# Altium PCB HU_revB.PcbDoc (part 5 of 5)
Units mm, origin at the board's own origin, x right, y up, seen from the top; angles counter-clockwise.
Board outline 164 x 90 mm, 6 copper layers (TOP, GND1, INT SIG, PWR + INT SIG, GND2, BOT), stack 1.538 mm thick; 404 components, 380 nets, 1687 pads, 328 vias.
Unrouted connection lines stored in the file: 342.
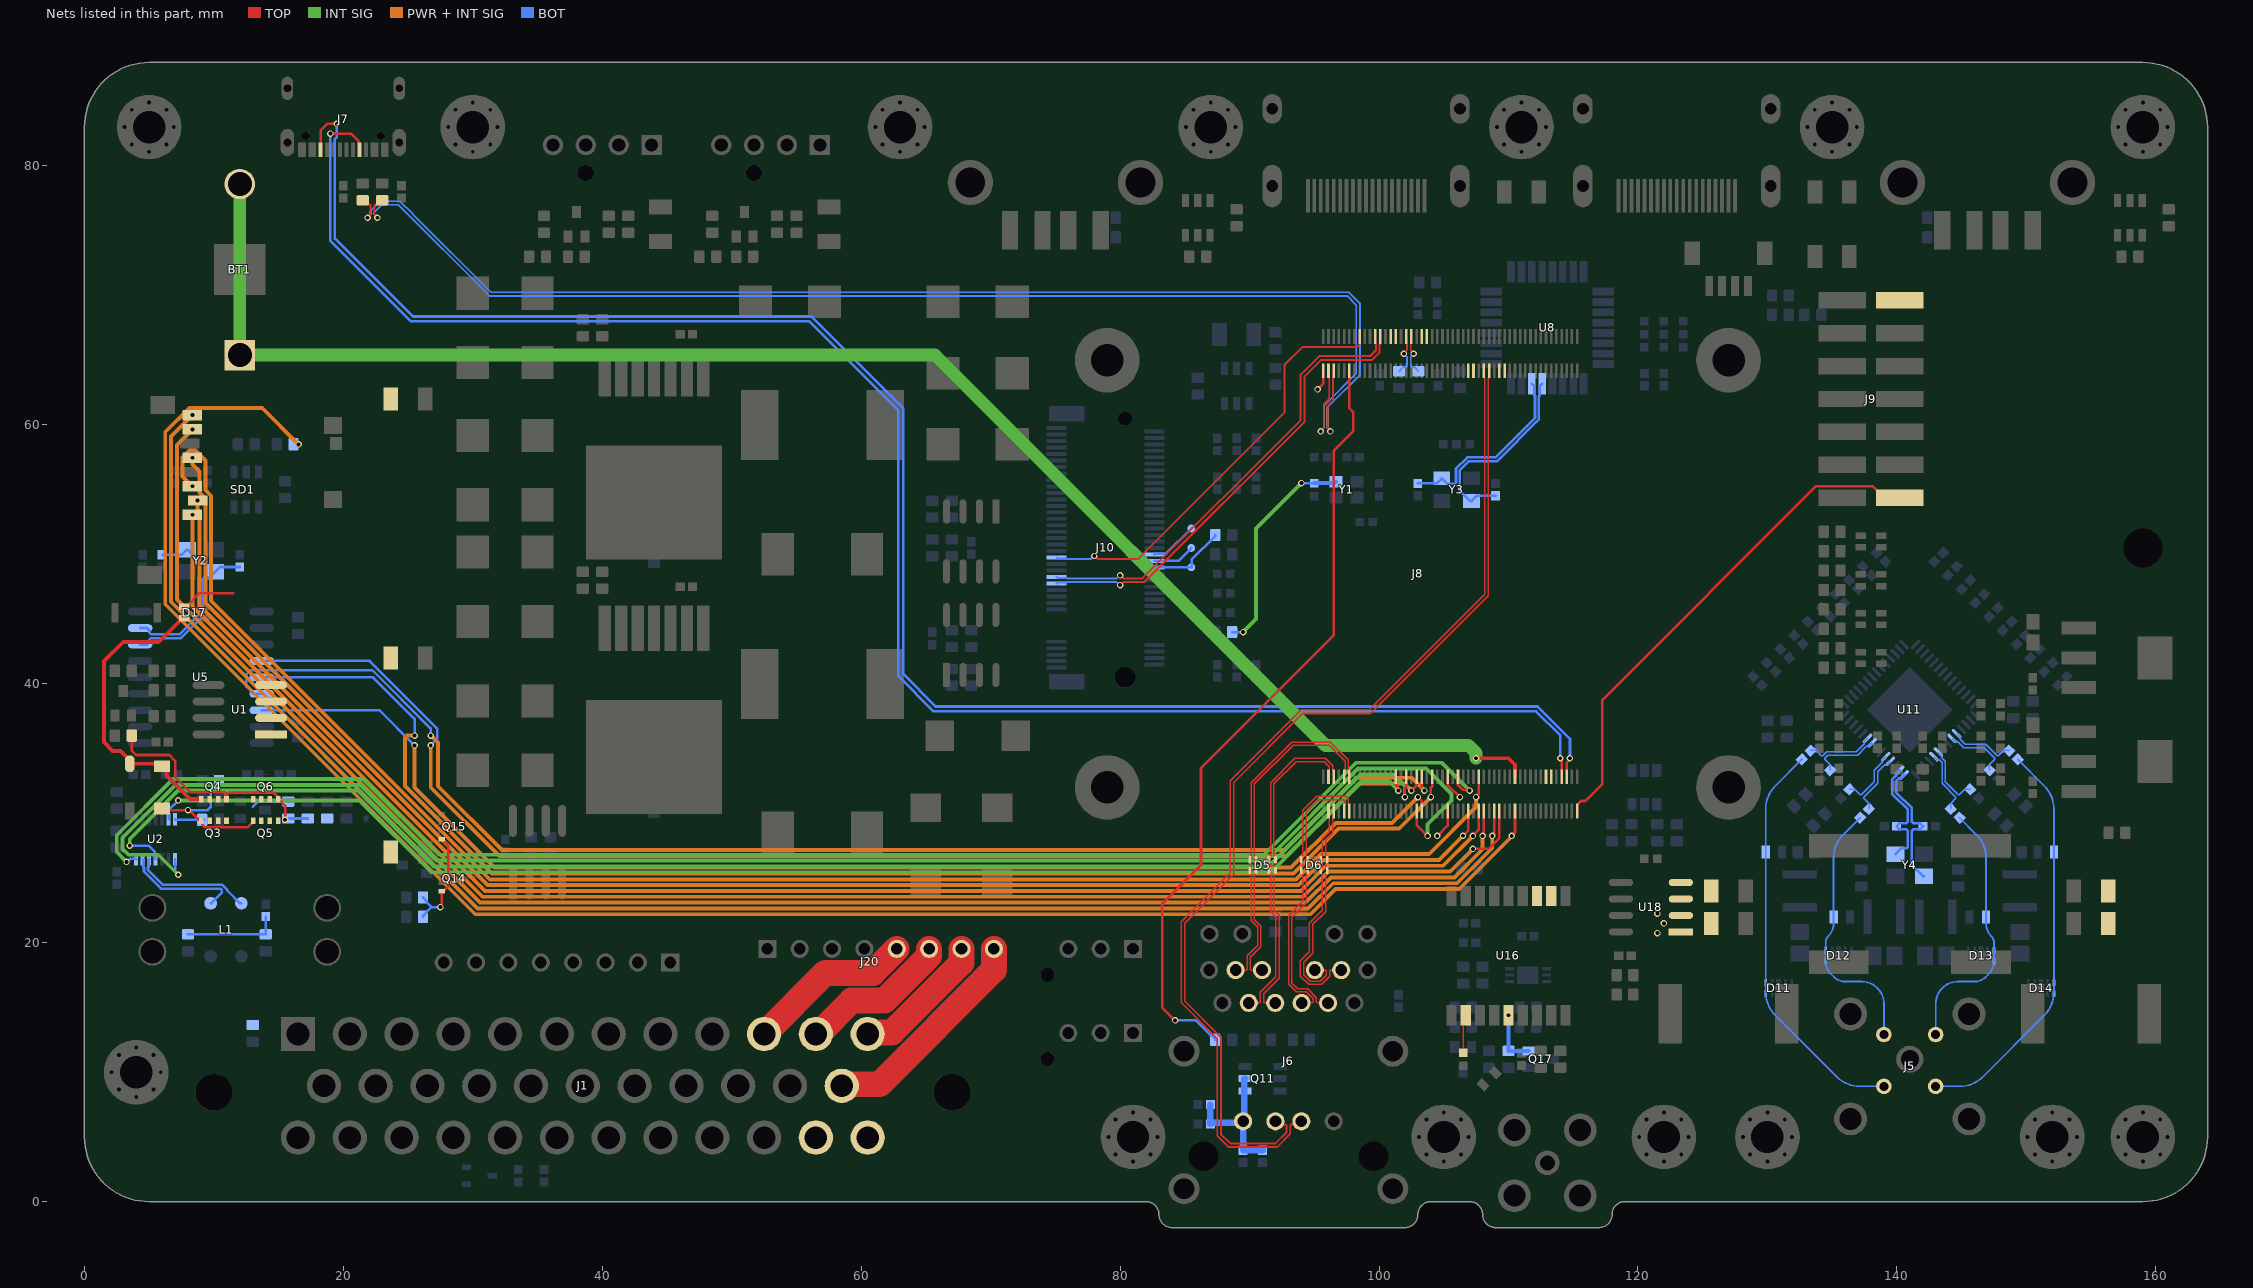
[diagram p8: the nets of this part, all layers, seen from the top]

## Via types
v1: diameter 0.5, hole 0.3, TOP to BOT, 308 vias
v2: diameter 0.5, hole 0.2, TOP to BOT, 16 vias
v3: diameter 0.75, hole 0.5, TOP to BOT, 4 vias

## Nets (pads, with @x,y where several pads share a name; then routed paths per layer and width w, separated by ;. In a path a pad name is that pad's centre, name@x,y a point inside that pad or via, vN(x,y) a via of type N, cw(c..) or ccw(c..) an arc to the next point about the centre after c; other vN are vias at no path point) (continued)
PCIE_RX0_P: J8.116 J10.41 | length 33.2
  TOP w0.155: v1(78,49.875) 78.041,49.875 78.263,49.652 81.402,49.652 92.695,60.945 92.695,64.626 94.091,66.023 96.126,66.023 98.294,66.023 98.477,66.206 98.477,66.797 J8.116@98.5,66.82
  BOT w0.155: J10.41@75.1,49.75 75.173,49.677 75.863,49.677 75.888,49.652 76.576,49.652 77.737,49.652 77.959,49.875 v1(78,49.875)
PCIE_TX0_N: J8.124 J10.49 | length 35.8
  TOP w0.155: v1(80,47.625) 80.041,47.625 80.263,47.848 81.848,47.848 94.25,60.25 94.25,63.75 95.5,65 99.431,65 100.052,65.621 100.052,66.257 100.077,66.282 100.077,66.797 J8.124@100.1,66.82
  BOT w0.155: J10.49@75.1,47.75 75.173,47.823 75.863,47.823 75.888,47.848 79.737,47.848 79.959,47.625 v1(80,47.625)
PCIE_TX0_P: J8.122 J10.47 | length 35.3
  TOP w0.155: v1(80,48.375) 80.041,48.375 80.263,48.152 81.721,48.152 93.945,60.376 93.945,63.876 95.374,65.305 99.305,65.305 99.748,65.748 99.748,66.257 99.723,66.282 99.723,66.797 J8.122@99.7,66.82
  BOT w0.155: J10.47@75.1,48.25 75.173,48.177 75.863,48.177 75.888,48.152 79.737,48.152 79.959,48.375 v1(80,48.375)
PMIC_EN: J8.99 J9.A7 | length 39.8
  TOP w0.2: J8.99@115.3,30.18 115.3,30.65 115.6,30.95 115.938,30.95 117.25,32.262 117.25,38.75 133.765,55.265 138.129,55.265 139.014,54.38 J9.A7@140.22,54.38
PoC_A: C70.2 D11.1 D11.10 J5.2 L6.2 | length 31.6
  BOT w0.14: C70.2@132.662,34.162 130.609,32.109 ccw(c132.405,30.313) 129.865,30.313 129.865,16.187 ccw(c132.405,16.187) 130.609,14.391 135.346,9.654 ccw(c137.142,11.45) 137.142,8.91 J5.2@139,8.91
PoC_B: C71.2 D12.1 D12.10 J5.1 L9.2 | length 20.7
  BOT w0.14: C71.2@137.162,29.662 135.859,28.359 ccw(c137.655,26.563) 135.115,26.563 135.115,21.502 cw(c133.698,21.502) 134.7,20.5 ccw(c135.183,20.017) 134.5,20.017 D12.10@134.5,18.583 ccw(c135.906,18.583) 134.912,17.588 135.147,17.353 ccw(c136,18.207) 136,17 137.293,17 cw(c137.293,15.293) 138.5,16.5 cw(c137.293,15.293) 139,15.293 J5.1@139,12.91
PoC_C: C74.2 D13.1 D13.10 J5.4 L15.2 | length 20.7
  BOT w0.14: J5.4@143,12.91 143,15.293 cw(c144.707,15.293) 143.5,16.5 cw(c144.707,15.293) 144.707,17 146,17 ccw(c146,18.207) 146.853,17.353 147.088,17.588 ccw(c146.094,18.583) D13.1@147.5,18.583 147.5,20.017 ccw(c146.817,20.017) 147.3,20.5 cw(c148.302,21.502) 146.885,21.502 146.885,26.563 ccw(c144.345,26.563) 146.141,28.359 C74.2@144.838,29.662
PoC_D: C75.2 D14.1 D14.10 J5.3 L12.2 | length 31.6
  BOT w0.14: J5.3@143,8.91 144.858,8.91 ccw(c144.858,11.45) 146.654,9.654 151.391,14.391 ccw(c149.595,16.187) 152.135,16.187 152.135,30.313 ccw(c149.595,30.313) 151.391,32.109 C75.2@149.338,34.162
PoC_PWR: F12.1 F13.1 F14.1 F15.1 U18.3 U18.4
PRE_CAN_N: L1.3 U2.12 | length 9.2
  BOT w0.2: U2.12@5,26.457 4.947,26.405 4.947,25.839 4.901,25.792 4.901,25.627 6.043,24.484 10.626,24.484 11.037,24.073 11.037,24.017 12.004,23.05 L1.3@12.125,23.05
PRE_CAN_P: L1.2 U2.13 | length 9
  BOT w0.2: U2.13@4.5,26.457 4.552,26.405 4.552,25.839 4.599,25.792 4.599,25.502 5.918,24.183 10.501,24.183 10.618,24.066 10.618,23.9 9.768,23.05 L1.2@9.75,23.05
PRE_PoC_PWR: F6.2 U18.1 U18.2
  other v1: 121.5,20.75 122,21.5 121.5,22.25
PRE_RC_DBG_USB_N: J8.103 R140.2 | length 97.5
  TOP w0.135: v1(22.625,76) 22.625,76.029 22.393,76.262 22.393,76.966 22.472,77.045 22.695,77.045 R140.2@23,77.35 ; v1(95.5,59.5) 95.5,59.529 95.732,59.762 95.732,61.603 96.157,62.028 96.157,63.598 96.132,63.623 96.132,64.148 J8.103@96.1,64.18
  BOT w0.135: v1(22.625,76) 22.625,76.029 22.393,76.262 22.393,76.429 22.964,77 24.25,77 31.285,69.965 97.535,69.965 98.25,69.25 98.25,64 95.899,61.649 95.732,61.482 95.732,59.762 95.5,59.529 v1(95.5,59.5)
PRE_RC_DBG_USB_P: J8.105 R23.2 | length 98.5
  TOP w0.135: R23.2@21.5,77.35 21.805,77.045 22.028,77.045 22.107,76.966 22.107,76.262 21.875,76.029 v1(21.875,76) ; v1(96.25,59.5) 96.25,59.529 96.018,59.762 96.018,61.485 96.443,61.91 96.443,63.598 96.468,63.623 96.468,64.148 J8.105@96.5,64.18
  BOT w0.135: v1(21.875,76) 21.875,76.029 22.107,76.262 22.107,76.547 22.845,77.285 24.368,77.285 25.351,76.303 25.452,76.202 31.404,70.25 97.654,70.25 98.535,69.368 98.535,63.882 96.018,61.364 96.018,59.762 96.25,59.529 v1(96.25,59.5)
PRE_SHUNT: Q4.5-6-7-8 Q6.5-6-7-8 U1.1 U1.2
PRE_VCC: D1.1 D3.2 D17.3 Q3.1 Q3.2 Q3.3 Q4.1 Q4.2 Q4.3 Q5.1 Q5.2 Q5.3 Q6.1 Q6.2 Q6.3 R15.2 | length 26.3
  TOP w0.3: D1.1@6,33.635 6.003,33.632 6.042,33.632 6.344,33.33 6.344,32.906 8.16,31.09 Q4.1@9.025,31.09 ; D1.1@6,33.75 5.925,33.825 D3.2@3.5,33.825 3.5,34.098 2.775,34.823 2.177,34.823 1.5,35.5 1.5,41.75 2.995,43.245 5.745,43.245 D17.3@7.525,45.025
  BOT w0.2: 13,30.5 13.4,30.9 R15.2@15.75,30.9
PWR_MOSFET: Q14.4 Q15.4 R109.1 R110.2 | length 8.5
  TOP w0.2: v1(27.5,22.75) 27.5,22.831 27.6,22.931 Q14.4@27.6,23.987 27.675,24.062 27.804,24.062 28.1,24.359 28.1,27.562 27.75,27.912 27.675,27.987 Q15.4@27.6,27.987
  BOT w0.2: R109.1@26.15,22 26.15,22.075 26.825,22.75 ; R110.2@26.15,23.5 26.45,23.2 26.45,23.125 26.825,22.75 ; v1(27.5,22.75) 26.825,22.75
PWR_OUT: D17.2 F3.1 F5.1 F6.1 F7.1 R13.2 U1.3 U1.4 | length 4.2
  TOP w0.2: D17.2@7.7,45.95 7.85,45.95 8.9,47 11.5,47
PWR_SW_MOS_GATE: Q4.4 Q6.4 R15.1 R16.2 R143.1 | length 18.9
  TOP w0.2: R143.1@3.65,36 3.65,34.85 4,34.5 6.554,34.5 7,34.054 7,32.816 8.206,31.61 10.783,31.61 10.9,31.493 10.9,31.165 Q4.4@10.975,31.09 11.041,31.156 11.041,31.473 11.159,31.59 14.604,31.59 14.9,31.294 14.9,31.165 Q6.4@14.975,31.09 15.5,30.565 v1(15.5,29.5)
  BOT w0.2: R15.1@15.75,29.6 R16.2@17.25,29.6
RF_IN: R115.1 U16.11 | length 3
  TOP w0.14: R115.1@106.5,11.5 106.5,13.917 cw(c107.183,13.917) U16.11@106.7,14.4
RL_N: J1.23 J20.8 | length 17.1
  TOP w2: J1.23@58.5,8.95 58.624,9.074 61.421,9.074 70.25,17.903 J20.8@70.25,19.525
RL_P: J1.12 J20.7 | length 10.6
  TOP w2: J1.12@60.5,12.95 60.624,13.074 62.38,13.074 67.75,18.444 J20.7@67.75,19.525
RP_MOS_LINK: D1.2 Q3.4 Q5.4 R12.2 | length 12.1
  TOP w0.2: D1.2@6,30.365 6.115,30.25 v1(8,30.25) ; v1@8.07,30.25 8.76,29.56 8.95,29.56 9.025,29.485 Q3.4@9.025,29.41 9.1,29.335 9.1,29.115 9.305,28.91 12.6,28.91 13.025,29.335 Q5.4@13.025,29.41
  BOT w0.2: v1(8,30.25) 9.52,30.25 9.75,30.48 9.75,31.25 9.75,31.52 9.75,31.775 10.4,32.425 R12.2@10.4,32.5
RPI_1V8: J8.88 J8.90
RR_N: J1.11 J20.6 | length 11.8
  TOP w2: J1.11@56.5,12.95 56.676,12.95 59.251,15.525 61.791,15.525 65.25,18.984 J20.6@65.25,19.525
RR_P: J1.10 J20.5 | length 13
  TOP w2: J1.10@52.5,12.95 57.225,17.675 60.9,17.675 J20.5@62.75,19.525
RXD: U16.3
SD_CLK: J8.57 SD1.5 | length 121.5
  TOP w0.2: v1(106.486,28.264) 106.9,28.678 J8.57@106.9,30.18
  PWR + INT SIG w0.3: v1(8.34,57.46) 8.34,56.938 8.89,56.388 8.89,54.788 9.34,54.338 9.34,46.232 31.122,24.45 93.768,24.45 95.718,26.4 104.622,26.4 v1(106.486,28.264)
SD_CMD: J8.62 SD1.3 | length 127.2
  TOP w0.2: v1(107.5,31.25) 107.5,31.317 107.7,31.517 J8.62@107.7,32.82
  PWR + INT SIG w0.3: v1(8.34,55.26) 7.59,56.01 7.59,57.488 8.112,58.01 8.568,58.01 9.34,57.238 9.34,54.974 9.79,54.524 9.79,46.419 31.309,24.9 93.582,24.9 95.532,26.85 103.878,26.85 107.5,30.472 v1(107.5,31.25)
SD_DAT0: J8.63 SD1.7 | length 128.9
  TOP w0.2: v1(108,28.25) 108,28.331 108.1,28.431 J8.63@108.1,30.18
  PWR + INT SIG w0.3: v1(8.34,59.66) 7.14,58.46 7.14,46.523 30.563,23.1 94.327,23.1 96.277,25.05 105.828,25.05 108,27.222 v1(108,28.25)
SD_DAT1: J8.67 SD1.8 | length 131.8
  TOP w0.2: v1(108.75,28.25) 108.75,28.331 108.9,28.481 J8.67@108.9,30.18
  PWR + INT SIG w0.3: v1(8.34,60.76) 6.69,59.11 6.69,46.337 30.377,22.65 94.514,22.65 96.464,24.6 106.014,24.6 108.75,27.336 v1(108.75,28.25)
SD_DAT2: J8.69 SD1.1 | length 121.3
  TOP w0.2: v1(107.25,27.25) 108.457,27.25 109.3,28.093 J8.69@109.3,30.18
  PWR + INT SIG w0.3: v1(8.34,53.06) 8.34,45.96 30.75,23.55 94.141,23.55 96.091,25.5 105.5,25.5 v1(107.25,27.25)
SD_DAT3: J8.61 SD1.2 | length 119.5
  TOP w0.2: v1(107.25,28.25) 107.25,28.269 107.7,28.719 J8.61@107.7,30.18
  PWR + INT SIG w0.3: v1(8.74,54.16) 8.74,53.438 8.89,53.288 8.89,46.046 30.936,24 93.954,24 95.904,25.95 104.95,25.95 v1(107.25,28.25)
SD_PWR_EN: J8.75 R60.2 | length 144
  TOP w0.2: v1(110.25,28.25) 110.25,28.267 110.5,28.517 J8.75@110.5,30.18
  PWR + INT SIG w0.3: v1(16.55,58.5) 13.74,61.31 8.112,61.31 6.24,59.438 6.24,46.15 30.19,22.2 94.7,22.2 96.65,24.15 106.201,24.15 110.25,28.199 v1(110.25,28.25)
SIOA_N: C72.1 U11.22 | length 5.2
  BOT w0.103: C72.1@134.838,33.338 134.854,33.354 134.854,33.756 134.437,34.173 134.437,34.258 134.675,34.497 136.968,34.497 137.654,35.182 137.828,35.182 U11.22@138.083,35.437
SIOA_P: C70.1 U11.23 | length 5.2
  BOT w0.103: C70.1@133.338,34.838 133.354,34.854 133.756,34.854 134.173,34.437 134.258,34.437 134.571,34.75 136.864,34.75 137.475,35.361 137.475,35.536 U11.23@137.73,35.79
SIOB_N: C73.1 U11.19 | length 4.8
  BOT w0.103: C73.1@136.338,31.838 136.354,31.854 136.756,31.854 137.173,31.437 137.258,31.437 138.261,32.44 138.261,33.319 138.889,33.947 138.889,34.121 U11.19@139.144,34.376
SIOB_P: C71.1 U11.18 | length 4.8
  BOT w0.103: C71.1@137.838,30.338 137.854,30.354 137.854,30.756 137.437,31.173 137.437,31.258 138.514,32.335 138.514,33.214 139.068,33.768 139.243,33.768 U11.18@139.497,34.023
SIOC_N: C76.1 U11.9 | length 5
  BOT w0.103: U11.9@143.21,34.73 143.464,34.475 143.464,34.3 143.75,34.015 143.75,32.429 144.742,31.437 144.827,31.437 145.244,31.854 145.646,31.854 C76.1@145.662,31.838
SIOC_P: C74.1 U11.10 | length 5
  BOT w0.103: U11.10@142.856,34.376 143.111,34.121 143.286,34.121 143.497,33.91 143.497,32.325 144.563,31.258 144.563,31.173 144.146,30.756 144.146,30.354 C74.1@144.162,30.338
SIOD_N: C77.1 U11.6 | length 5
  BOT w0.103: U11.6@144.27,35.79 144.525,35.536 144.7,35.536 145.173,35.062 146.759,35.062 147.563,34.258 147.563,34.173 147.146,33.756 147.146,33.354 C77.1@147.162,33.338
SIOD_P: C75.1 U11.5 | length 5
  BOT w0.103: U11.5@144.624,36.144 144.879,35.889 144.879,35.714 145.278,35.315 146.864,35.315 147.742,34.437 147.827,34.437 148.244,34.854 148.646,34.854 C75.1@148.662,34.838
SMB_CLK: J10.40 TP1.1 | length 3.7
  BOT w0.2: J10.40@82.65,50 82.7,50.05 83.55,50.05 TP1.1@85.5,52
SMB_DATA: J10.42 TP2.1 | length 3.3
  BOT w0.2: J10.42@82.65,49.5 84.5,49.5 TP2.1@85.5,50.5
SMB_nALERT: J10.44 R40.2 TP3.1 | length 6.1
  BOT w0.2: J10.44@82.65,49 TP3.1@85.5,49 85.525,49.025 85.525,49.6 87.35,51.425 R40.2@87.35,51.5
SPI0_MISO: J8.40 U5.15 | length 105.5
  TOP w0.2: J8.40@103.3,32.82 103.3,32.006 103.5,31.806 v1(103.5,31.75)
  PWR + INT SIG w0.3: v1(26.75,36) 26.778,36 27.3,35.478 27.3,32.091 32.241,27.15 92.65,27.15 98.25,32.75 102.5,32.75 v1(103.5,31.75)
  BOT w0.2: U5.15@13.7,39.23 13.05,39.23 12.5,39.78 12.5,40.728 12.822,41.05 22.245,41.05 26.745,36.55 26.745,36.005 v1(26.75,36)
SPI0_MOSI: J8.44 U5.14 | length 105.1
  TOP w0.2: v1(104,31.25) 104,31.957 104.1,32.057 J8.44@104.1,32.82
  PWR + INT SIG w0.3: v1(25.5,36) 24.926,36 24.75,35.824 24.75,32.095 31.495,25.35 93.395,25.35 96.859,28.814 101.564,28.814 v1(104,31.25)
  BOT w0.2: U5.14@13.7,40.5 22.3,40.5 25.5,37.3 v1(25.5,36)
SPI0_nCS0: J8.39 U5.16 | length 99.7
  TOP w0.2: v1(103,31.25) 103.3,30.95 J8.39@103.3,30.18
  PWR + INT SIG w0.3: v1(25.5,35.25) 25.5,31.982 31.682,25.8 93.209,25.8 96.673,29.264 101.014,29.264 v1(103,31.25)
  BOT w0.2: U5.16@13.7,37.96 22.79,37.96 v1(25.5,35.25)
SPI0_SCLK: J8.38 U5.13 | length 102.2
  TOP w0.2: v1(102.5,31.749) 102.9,32.149 J8.38@102.9,32.82
  PWR + INT SIG w0.3: v1(26.75,35.25) 26.75,32.004 32.054,26.7 92.836,26.7 98.436,32.3 101.949,32.3 v1(102.5,31.749)
  BOT w0.2: U5.13@13.7,41.77 22.02,41.77 27.25,36.54 27.25,35.75 v1(26.75,35.25)
SPI1_nCS0: J8.49 U6.1 | length 2.3
  TOP w0.2: v1(104.5,28.25) 105.3,29.05 J8.49@105.3,30.18
SPI1_nCS1: J8.50 U7.1 | length 2
  TOP w0.2: J8.50@105.3,32.82 105.3,32.196 106.246,31.25 v1(106.25,31.25)
SPI3_MISO: J8.34 U2.11 | length 111.5
  TOP w0.2: v1(102,31.25) 102,31.957 102.1,32.057 J8.34@102.1,32.82
  INT SIG w0.2: v1(102,31.25) 102,32.1
  INT SIG w0.3: v1(3.5,27.5) 3.5,28.027 7.223,31.75 21.146,31.75 26.996,25.9 91.473,25.9 98.573,33 101.1,33 102,32.1
  BOT w0.2: v1(3.5,27.5) 4.952,27.5 5.448,27.004 5.448,26.509 U2.11@5.5,26.457
SPI3_MOSI: J8.30 U2.6 | length 102.7
  TOP w0.2: J8.30@101.3,32.82 101.3,32.196 101.443,32.054 101.443,31.807 v1(101.5,31.75)
  INT SIG w0.3: v1(7.25,31) 21.26,31 26.809,25.45 91.659,25.45 98.709,32.5 100.75,32.5 v1(101.5,31.75)
  BOT w0.2: U2.6@6.5,29.543 6.5,30.25 v1@7.25,31
SPI3_nCS0: J8.54 U2.14 | length 117.5
  TOP w0.2: J8.54@106.1,32.82 106.1,32.196 106.489,31.807 106.943,31.807 v1(107,31.75)
  INT SIG w0.3: v1(3.25,26.25) 2.5,27 2.5,28.3 6.85,32.65 21.519,32.65 27.369,26.8 91.1,26.8 98.2,33.9 104.85,33.9 v1(107,31.75)
  BOT w0.2: v1(3.25,26.25) 3.297,26.25 3.547,26.5 3.947,26.5 3.99,26.457 U2.14@4,26.457
SPI3_SCLK: J8.37 U2.8 | length 124.1
  TOP w0.2: J8.37@102.9,30.18 102.9,29.1 v1(103.75,28.25)
  INT SIG w0.3: v1(7.25,25.25) 5.7,26.8 3.4,26.8 2.95,27.25 2.95,28.114 7.036,32.2 21.332,32.2 27.182,26.35 91.286,26.35 98.386,33.45 103.65,33.45 105.6,31.5 105.6,31 103.75,29.15 v1(103.75,28.25)
  BOT w0.2: U2.8@7,26.457 7,25.5 v1(7.25,25.25)
SUB_N: J1.35
SUB_P: J1.34
SUSCLK_32: R39.1 R49.2 Y1.3 | length 16.9
  INT SIG w0.3: v1(89.5,44) 90.5,45 90.5,52 v1(94,55.5)
  BOT w0.2: R39.1@88.65,44 v1(89.5,44) ; v1(94,55.5) R49.2@95,55.5
  BOT w0.3: R49.2@95,55.5 96.575,55.5 Y1.3@96.688,55.613
TCAN_CAN_INH: R17.1 R22.2 U2.7 | length 2.3
  BOT w0.2: U2.7@7,29.543 7.043,29.5 R17.1@9.25,29.5
TERM_CAP: C9.2 R21.1 R24.2 | length 7.4
  BOT w0.2: R24.2@8,20.65 R21.1@14,20.65 C9.2@14,22.021
TRD0_N: D5.2 D5.9 J6.10 J8.10 | length 26
  TOP w0.103: J6.10@90.96,17.89 90.127,17.89 90.066,17.95 90.066,18.876 90.877,19.687 90.877,21.288 90.376,21.789 90.376,25.291 90.437,25.351 90.451,25.351 90.5,25.4 90.5,25.765 90.451,25.814 90.437,25.814 90.376,25.874 90.376,26.126 90.437,26.186 90.451,26.186 90.5,26.235 90.5,26.6 90.451,26.649 90.437,26.649 90.376,26.709 90.376,32.269 93.358,35.25 96.142,35.25 97.374,34.019 97.374,33.364 97.3,33.29 J8.10@97.3,32.82
TRD0_P: D5.1 D5.10 J6.11 J8.12 | length 26.8
  TOP w0.103: J6.11@88.92,17.89 89.753,17.89 89.814,17.95 89.814,18.98 90.624,19.791 90.624,21.183 90.124,21.684 90.124,25.291 90.063,25.351 90.049,25.351 90,25.4 90,25.765 90.049,25.814 90.063,25.814 90.124,25.874 90.124,26.126 90.063,26.186 90.049,26.186 90,26.235 90,26.6 90.049,26.649 90.063,26.649 90.124,26.709 90.124,32.374 93.253,35.503 96.247,35.503 97.626,34.124 97.626,33.364 97.7,33.29 J8.12@97.7,32.82
TRD1_N: D5.4 D5.7 J6.5 J8.6 | length 25.5
  TOP w0.103: J6.5@89.94,15.35 90.773,15.35 90.834,15.41 90.834,16.169 92.024,17.359 92.024,22.01 91.624,22.411 91.624,25.291 91.563,25.351 91.549,25.351 91.5,25.4 91.5,25.765 91.549,25.814 91.563,25.814 91.624,25.874 91.624,26.126 91.563,26.186 91.549,26.186 91.5,26.235 91.5,26.6 91.549,26.649 91.563,26.649 91.624,26.709 91.624,32.374 93.503,34.253 95.855,34.253 96.426,33.681 96.426,33.364 96.5,33.29 J8.6@96.5,32.82
TRD1_P: D5.5 D5.6 J6.4 J8.4 | length 24.7
  TOP w0.103: J6.4@91.98,15.35 91.147,15.35 91.086,15.41 91.086,16.064 92.277,17.255 92.277,22.115 91.876,22.516 91.876,25.291 91.937,25.351 91.951,25.351 92,25.4 92,25.765 91.951,25.814 91.937,25.814 91.876,25.874 91.876,26.126 91.937,26.186 91.951,26.186 92,26.235 92,26.6 91.951,26.649 91.937,26.649 91.876,26.709 91.876,32.269 93.608,34 95.75,34 96.174,33.576 96.174,33.364 96.1,33.29 J8.4@96.1,32.82
TRD2_N: D6.2 D6.9 J6.2 J8.9 | length 21.8
  TOP w0.103: J6.2@96.06,15.35 95.227,15.35 95.166,15.41 95.166,15.769 94.479,16.457 93.708,16.457 93.276,16.89 93.276,21.983 94.376,23.084 94.376,25.291 94.437,25.351 94.451,25.351 94.5,25.4 D6.2@94.5,25.583 94.5,25.765 94.451,25.814 94.437,25.814 94.376,25.874 94.376,26.126 94.437,26.186 94.451,26.186 94.5,26.235 D6.9@94.5,26.418 94.5,26.6 94.451,26.649 94.437,26.649 94.376,26.709 94.376,27.144 94.376,27.145 94.376,30.126 95.311,31.061 97.313,31.061 97.374,31.001 97.374,30.724 97.3,30.65 J8.9@97.3,30.18
TRD2_P: D6.1 D6.10 J6.3 J8.11 | length 22.7
  TOP w0.103: J6.3@94.02,15.35 94.853,15.35 94.914,15.41 94.914,15.665 94.374,16.204 93.603,16.204 93.023,16.785 93.023,22.088 94.124,23.189 94.124,25.291 94.063,25.351 94.049,25.351 94,25.4 D6.1@94,25.583 94,25.765 94.049,25.814 94.063,25.814 94.124,25.874 94.124,26.126 94.063,26.186 94.049,26.186 94,26.235 D6.10@94,26.418 94,26.6 94.049,26.649 94.063,26.649 94.124,26.709 94.124,27.039 94.123,27.04 94.123,30.23 95.207,31.314 97.418,31.314 97.626,31.106 97.626,30.724 97.7,30.65 J8.11@97.7,30.18
TRD3_N: D6.5 D6.6 J6.9 J8.5 | length 17.2
  TOP w0.103: J6.9@95.04,17.89 95.873,17.89 95.934,17.83 95.934,17.509 95.46,17.036 94.686,17.036 94.186,17.536 94.186,18.493 94.876,19.183 94.876,21.411 95.876,22.412 95.876,25.291 95.937,25.351 95.951,25.351 96,25.4 96,25.765 95.951,25.814 95.937,25.814 95.876,25.874 95.876,26.126 95.937,26.186 95.951,26.186 96,26.235 96,26.6 95.951,26.649 95.937,26.649 95.876,26.709 95.876,27.932 96.426,28.482 96.426,29.636 96.5,29.71 J8.5@96.5,30.18
TRD3_P: D6.4 D6.7 J6.8 J8.3 | length 18.1
  TOP w0.103: J8.3@96.1,30.18 96.1,29.71 96.174,29.636 96.174,28.587 95.624,28.037 95.624,26.709 95.563,26.649 95.549,26.649 95.5,26.6 95.5,26.235 95.549,26.186 95.563,26.186 95.624,26.126 95.624,25.874 95.563,25.814 95.549,25.814 95.5,25.765 95.5,25.4 95.549,25.351 95.563,25.351 95.624,25.291 95.624,22.517 94.623,21.516 94.623,19.288 93.933,18.598 93.933,17.431 94.581,16.783 95.565,16.783 96.186,17.404 96.186,17.83 96.247,17.89 J6.8@97.08,17.89
TUSB2036_X_N: C59.1 U8.29 Y3.3 | length 15.4
  BOT w0.2: C59.1@109,54.521 107.546,54.521 Y3.3@107.15,54.125 107.025,54.125 106.233,54.917 106.233,55.426 106.25,55.442 106.25,56.504 106.945,57.198 109.125,57.198 109.302,57.375 112.174,60.248 112.351,60.424 112.351,62.206 112.4,62.256 112.4,62.975 U8.29@112.6,63.175
TUSB2036_X_P: C58.1 U8.30 Y3.1 | length 14.9
  BOT w0.2: C58.1@103,55.479 104.454,55.479 Y3.1@104.85,55.875 105.275,55.45 105.831,55.45 105.948,55.567 105.948,56.628 106.82,57.5 109,57.5 112.049,60.549 112.049,62.206 112,62.256 112,62.975 U8.30@111.8,63.175
TXD: U16.2
USB2_CC1: J7.A5 J8.94 | length 137.5
  TOP w0.2: v1(19,82.5) 20.574,82.5 21.2,81.874 21.2,81.3 J7.A5@21.25,81.25 ; v1(114,34.25) 114,34.169 114.1,34.069 J8.94@114.1,32.82
  BOT w0.2: v1(19,82.5) 19,74.223 25.223,68 56,68 62.878,61.122 62.878,40.596 65.596,37.878 112.128,37.878 114,36.005 v1(114,34.25)
USB2_CC2: J7.B5 J8.96 | length 138.3
  TOP w0.2: J7.B5@18.25,81.25 18.25,82.75 18.75,83.25 v1(19.5,83.25) ; J8.96@114.5,32.82 114.5,33.919 114.75,34.169 v1(114.75,34.25)
  BOT w0.2: v1(19.5,83.25) 19.5,82.25 19.35,82.1 19.35,74.4 25.378,68.372 56.154,68.372 63.25,61.277 63.25,40.75 65.75,38.25 112.25,38.25 114.75,35.75 v1(114.75,34.25)
USB3_0_D_N: J8.136 R71.2 | length 3.3
  TOP w0.135: J8.136@102.5,66.82 102.468,66.788 102.468,66.263 102.443,66.238 102.443,65.929 102.443,65.762 102.675,65.529 v1(102.675,65.5)
  BOT w0.135: v1(102.675,65.5) 102.675,65.471 102.443,65.238 102.443,64.801 102.443,64.534 102.522,64.455 102.745,64.455 R71.2@103.05,64.15
USB3_0_D_P: J8.134 R74.2 | length 3.3
  TOP w0.135: v1(101.925,65.5) 101.925,65.529 102.157,65.762 102.157,66.047 102.157,66.238 102.132,66.263 102.132,66.788 J8.134@102.1,66.82
  BOT w0.135: R74.2@101.55,64.15 101.855,64.455 102.078,64.455 102.157,64.534 102.157,64.682 102.157,65.238 101.925,65.471 v1(101.925,65.5)
USB3_0_RX_N: J8.128
USB3_0_RX_P: J8.130
USB3_0_TX_N: J8.140
USB3_0_TX_P: J8.142
USB3_1_D_N: J6.U2 J8.165 | length 80.2
  TOP w0.135: J6.U2@92,6.21 92.242,5.968 92.771,5.968 92.857,5.882 92.857,5.357 92,4.5 88.5,4.5 87.785,5.215 87.785,12.715 85,15.5 85,21.5 88.785,25.285 88.785,32.382 94.118,37.715 99.368,37.715 108.443,46.789 108.443,63.598 108.468,63.623 108.468,64.148 J8.165@108.5,64.18
USB3_1_D_P: J6.U3 J8.163 | length 81.1
  TOP w0.135: J6.U3@94,6.21 93.758,5.968 93.229,5.968 93.143,5.882 93.143,5.239 92.118,4.215 88.382,4.215 87.5,5.096 87.5,12.596 84.715,15.382 84.715,21.618 88.5,25.404 88.5,32.5 94,38 99.25,38 108.157,46.907 108.157,63.598 108.132,63.623 108.132,64.148 J8.163@108.1,64.18
USB3_1_RX_N: J8.157
USB3_1_RX_P: J8.159
USB3_1_TX_N: J8.169
USB3_1_TX_P: J8.171
USB_OTG_ID: J8.101 J9.A1 | length 1.6
  TOP w0.2: v1(95.25,62.75) 95.7,63.2 J8.101@95.7,64.18
USB_VBUS_0: C42.1 C43.1 C110.1 C111.1 J6.U1 Q11.1 Q11.2 | length 11.2
  BOT w0.5: C42.1@86.979,7.5 C43.1@86.979,6 87.065,6.086 89.376,6.086 J6.U1@89.5,6.21 ; Q11.2@89.65,9.5 89.6,9.5 89.575,9.475 89.575,6.285 J6.U1@89.5,6.21 ; C110.1@91,3.979 C111.1@89.5,3.979 J6.U1@89.5,6.21
USB_VBUS_EN: J8.111 R63.2 | length 60.6
  TOP w0.2: v1(84.25,14) 83.25,15 83.25,23 86.25,26 86.25,33.5 96.5,43.75 96.5,58 98,59.5 98,61 97.7,61.3 J8.111@97.7,64.18
  BOT w0.2: v1(84.25,14) 85.85,14 86.975,12.875 87.05,12.875 87.35,12.575 R63.2@87.35,12.5
VBAT: BT1.1 BT1.2 J8.76 | length 126
  TOP w0.3: v1(107.5,34.25) 110,34.25 110.5,33.75 J8.76@110.5,32.82
  INT SIG w1: BT1.2@12,78.605 BT1.1@12,65.395 65.705,65.395 95.85,35.25 106.914,35.25 107.5,34.664 v1(107.5,34.25)
VCC_RF: Q17.2 R118.2 U16.14 | length 4.3
  BOT w0.3: v1(110,14.4) R118.2@110,11.65 Q17.2@111.55,11.65
X25_N: C79.2 U11.16 Y4.3 | length 9.2
  BOT w0.2: Y4.3@139.9,26.85 140.334,27.284 140.731,27.284 140.848,27.402 140.848,27.683 140.849,28.647 140.732,28.764 140.215,28.764 C79.2@139.979,29 140.215,29.236 140.732,29.236 140.849,29.353 140.849,30.281 139.638,31.491 139.638,32.609 139.947,32.918 139.947,33.058 U11.16@140.205,33.315
X25_P: C78.2 U11.15 Y4.1 | length 10.4
  BOT w0.2: U11.15@140.558,32.962 140.301,32.705 140.161,32.705 139.94,32.484 139.94,31.616 141.151,30.405 141.151,29.353 141.268,29.236 141.785,29.236 C78.2@142.021,29 141.785,28.764 141.268,28.764 141.151,28.647 141.151,27.559 ; 141.15,27.558 141.15,27.277 141.145,27.271 141.145,26.005 142,25.15 Y4.1@142.1,25.15
X_N: C33.1 U5.7 Y2.3 | length 12
  BOT w0.2: U5.7@4.3,43.04 4.842,43.04 5.027,43.225 5.027,43.402 5.149,43.524 7.451,43.524 7.627,43.701 8.975,45.048 9.152,45.225 9.152,48.098 9.269,48.216 9.666,48.216 Y2.3@10.1,48.65 10.471,49.021 C33.1@12,49.021
X_P: C32.1 U5.8 Y2.1 | length 13
  BOT w0.2: U5.8@4.3,44.31 4.842,44.31 5.027,44.125 5.027,43.948 5.149,43.826 7.326,43.826 8.85,45.35 8.85,48.223 8.855,48.229 8.855,49.495 8,50.35 Y2.1@7.9,50.35 7.529,49.979 C32.1@6,49.979
pads on no net: D11.2 D11.4 D11.5 D11.6 D11.7 D11.9 D12.2 D12.4 D12.5 D12.6 D12.7 D12.9 D13.2 D13.4 D13.5 D13.6 D13.7 D13.9 D14.2 D14.4 D14.5 D14.6 D14.7 D14.9 D16.2 D16.3 J1. J3. J4. J6.MH5 J6.MH6 J7. J7.A4_B9 J7.A8 J7.B4_A9 J7.B8 J8.24 J8.29 J8.41 J8.45 J8.47 J8.51 J8.55 J8.56 J8.58 J8.64 J8.68 J8.70 J8.72 J8.73 J10. J10.5 J10.6 J10.7 J10.8 J10.11 J10.13 J10.17 J10.19 J10.20 J10.22 J10.23 J10.24 J10.25 J10.26 J10.28 J10.29 J10.30 J10.31 J10.32 J10.34 J10.35 J10.36 J10.37 J10.38 J10.46 J10.48 J10.56 J10.58 J10.67 J10.69 J13_DISP_0.14 J13_DISP_1.14 J17. J18. J19. J20. R138.1 R139.1 U3.5 U5.3 U5.4 U5.5 U5.6 U5.10 U5.11 U8.5 U8.9 U8.10 U8.13 U8.14 U8.17 U8.18 U8.32 U9.5 U11.1 U11.2 U11.3 U11.12 U11.26 U11.27 U11.33 U11.34 U11.51 U11.52 U16.4 U16.5 U16.6 U16.15 U17.1
copper on no net:
  other v1: 99.525,42.25 100.275,42.25 101.925,44.25 102.675,44.25 100.725,46.25 101.475,46.25 103.125,48.75 103.875,48.75 110.325,51.25 111.075,51.25 112.725,53.25 113.475,53.25 111.525,55.25 112.275,55.25 113.925,57.25 114.675,57.25 115.125,59.25 115.875,59.25

## Polygon pours and split planes (outlines as drawn)
DES_1V8 on TOP "DES_1V8_L01_P061" (solid, remove dead copper, pour order 61): 157.5,40 157.5,40.75 151,40.75 151,41.5 149.75,41.5 149.75,44 152.25,44 152.25,43.5 155.75,43.5 155.75,44 161.5,44 161.5,40
DES_1V2 on TOP "DES_1V2_L01_P060" (solid, remove dead copper, pour order 60): 157.5,32 157.5,32.75 151,32.75 151,33.5 149.75,33.5 149.75,36 152.25,36 152.25,35.5 155.75,35.5 155.75,36 161.5,36 161.5,32
3V3_AUX on TOP "3V3_AUX_L01_P059" (solid, remove dead copper, pour order 59): 157.5,30.75 157.5,32.75 151,32.75 151,32 150,32 150,30.75
3V3_AUX on TOP "3V3_AUX_L01_P058" (solid, remove dead copper, pour order 58): 157.5,38.75 157.5,40.75 151,40.75 151,40 150,40 150,38.75
NetQ3_5-6-7-8 on TOP "NETQ3_5-6-7-8_L01_P033" (solid, remove dead copper, pour order 33): 16,29 2,29 2,17 16,17
5V_MAIN on TOP "5V_MAIN_L01_P044" (solid, remove dead copper, pour order 44): 110.75,27.75 110.75,30.75 113,30.75 113,27.75
3V3_MAIN on TOP "3V3_MAIN_L01_P051" (solid, remove dead copper, pour order 51): 112.75,32.25 112,32.25 112,33.5 112.75,33.5
RPI_1V8 on TOP "RPI_1V8_L01_P050" (solid, remove dead copper, pour order 50): 112.75,33.5 113.5,33.5 113.5,32.25 112.75,32.25
PRE_PoC_PWR on TOP "PRE_POC_PWR_L01_P049" (solid, remove dead copper, pour order 49): 121,22.75 124.5,22.75 124.5,20 121,20
PoC_PWR on TOP "POC_PWR_L01_P048" (solid, remove dead copper, pour order 48): 121,22.75 124.5,22.75 124.5,20 127,20 127,25.5 121,25.5
3V3_AUX on TOP "3V3_AUX_L01_P047" (solid, remove dead copper, pour order 47): 68.5,51 73.5,51 73.5,56.75 68.5,56.75
5V_MAIN on TOP "5V_MAIN_L01_P045" (solid, remove dead copper, pour order 45): 68.5,43 73.5,43 73.5,37.75 68.5,37.75
PRE_VCC on TOP "PRE_VCC_L01_P000" (solid, remove dead copper, pour order 0): 15.15,29.16 15.15,30.84 14.8,30.84 14.8,31.34 11.15,31.34 11.15,30.84 10.8,30.84 10.8,31.34 8.85,31.34 8.85,29.66 9.2,29.66 9.2,29.16 12.85,29.16 12.85,29.66 13.2,29.66 13.2,29.16
PRE_SHUNT on TOP "PRE_SHUNT_L01_P001" (solid, remove dead copper, pour order 1): 11,38 11,35.5 8,35.5 8,31.5 16,31.5 16,38
NetF7_2 on TOP "NETF7_2_L01_P006" (solid, remove dead copper, pour order 6): 25,22.5 25,31 28,31 28,22.5
5V_MAIN on TOP "5V_MAIN_L01_P041" (solid, remove dead copper, pour order 41): 84.5,76.75 84.5,79 86.5,79 86.5,76.75
5V_MAIN on TOP "5V_MAIN_L01_P040" (solid, remove dead copper, pour order 40): 156.5,76.75 156.5,79 158.5,79 158.5,76.75
DISP_5V_DISP_0 on TOP "DISP_5V_DISP_0_L01_P039" (solid, remove dead copper, pour order 39): 149.75,76.75 149.75,73.25 156.75,73.25 156.75,73.75 158.5,73.75 158.5,76.75
DISP_5V_DISP_1 on TOP "DISP_5V_DISP_1_L01_P038" (solid, remove dead copper, pour order 38): 77.75,76.75 77.75,73.25 84.75,73.25 84.75,73.75 86.5,73.75 86.5,76.75
AMP_VCC on TOP "AMP_VCC_L01_P037" (solid, remove dead copper, pour order 37): 35,28 49.5,28 49.5,26.5 56.5,26.5 56.5,15 41.5,15 41.5,19.5 35,19.5
NetC62_1 on TOP "NETC62_1_L01_P032" (solid, remove dead copper, pour order 32): 45.845,65.995 47.345,65.995 47.345,58.495 38.845,58.495 38.845,56 25.095,56 25.095,67.5 39.845,67.5 39.845,62.245 45.845,62.245
3V3_REG_FB on TOP "3V3_REG_FB_L01_P021" (solid, remove dead copper, pour order 21): 60.25,57 60.25,68 55.75,68 55.75,71 68.5,71 68.5,51 64.5,51 64.5,57
GND on TOP "GND_L01_P024" (solid, remove dead copper, pour order 24): 44.75,61.9 43.25,61.9 43.25,65.9 42.75,65.9 42.75,66.9 45.25,66.9 45.25,65.9 44.75,65.9
BAT_12V on TOP "BAT_12V_L01_P034" (solid, remove dead copper, pour order 34): 16,26 16,17 14,17 14,7 25,7 25,11 23,11 23,26
NetC12_1 on TOP "NETC12_1_L01_P031" (solid, remove dead copper, pour order 31): 45.75,46.25 47.25,46.25 47.25,38.75 38.75,38.75 38.75,36.5 25,36.5 25,47.5 39.75,47.5 39.75,42.5 45.75,42.5
PWR_OUT on TOP "PWR_OUT_L01_P030" (solid, remove dead copper, pour order 30): 20,67.5 20,47.5 11,47.5 11,38 16,38 16,26 25,26 25,31 25,67.5
NetQ14_5-6-7-8 on TOP "NETQ14_5-6-7-8_L01_P007" (solid, remove dead copper, pour order 7): 28,31 32.5,31 32.5,28 35,28 35,22 28,22
NetC61_2 on TOP "NETC61_2_L01_P020" (solid, remove dead copper, pour order 20): 47.25,66 56.5,66 56.5,48.25 49.5,48.25 49.5,58.5 47.25,58.5
5V_REG_FB on TOP "5V_REG_FB_L01_P019" (solid, remove dead copper, pour order 19): 62,29 62,30.25 60.25,30.25 60.25,43 68.5,43 68.5,34.25 73.5,34.25 73.5,29
GND on TOP "GND_L01_P018" (solid, remove dead copper, pour order 18): 44.75,42.25 43.25,42.25 43.25,46.25 42.75,46.25 42.75,47.25 45.25,47.25 45.25,46.25 44.75,46.25
NetC11_2 on TOP "NETC11_2_L01_P016" (solid, remove dead copper, pour order 16): 47.25,46 56.5,46 56.5,26.5 49.5,26.5 49.5,38.75 47.25,38.75
M2_3V3 on BOT "M2_3V3_L06_P025" (solid, remove dead copper, pour order 25): 91.25,55.5 91.25,42.75 81.75,42.75 81.75,41 93.25,41 93.25,62.5 88.5,62.5 88.5,59.75 81.75,59.75 81.75,58.75 83.5,58.75 83.5,58.5 91.25,58.5 91.25,57.25 81.75,57.25 81.75,55.5
3V3_AUX on BOT "3V3_AUX_L06_P055" (solid, remove dead copper, pour order 55): 88.5,68 86,68 86,65.5 88.5,65.5
5V_MAIN on BOT "5V_MAIN_L06_P053" (solid, remove dead copper, pour order 53): 91.5,10 94,10 94,8 91.5,8
BAT_12V on BOT "BAT_12V_L06_P035" (solid, remove dead copper, pour order 35): 16,26 16,17 14,17 14,7 25,7 25,11 23,11 23,26
NetC100_1 on BOT "NETC100_1_L06_P008" (solid, remove dead copper, pour order 8): 133.228,21.808 133.825,22.405 133.825,23.055 131.175,23.055 131.175,22.405 131.772,21.808 131.772,20.198 133.228,20.198
NetC102_1 on BOT "NETC102_1_L06_P009" (solid, remove dead copper, pour order 9): 150.228,21.808 150.825,22.405 150.825,23.055 148.175,23.055 148.175,22.405 148.772,21.808 148.772,20.198 150.228,20.198
NetC101_1 on BOT "NETC101_1_L06_P010" (solid, remove dead copper, pour order 10): 139.198,18.272 139.198,23.325 140.595,23.325 140.595,18.272
NetC103_1 on BOT "NETC103_1_L06_P011" (solid, remove dead copper, pour order 11): 142.802,18.272 142.802,23.325 141.405,23.325 141.405,18.272
NetL5_2 on BOT "NETL5_2_L06_P012" (solid, remove dead copper, pour order 12): 130.75,27.75 133,27.75 133,26 134,26 134,24.5 130.75,24.5
NetL11_2 on BOT "NETL11_2_L06_P013" (solid, remove dead copper, pour order 13): 151.25,27.75 149,27.75 149,26 148,26 148,24.5 151.25,24.5
NetL8_2 on BOT "NETL8_2_L06_P014" (solid, remove dead copper, pour order 14): 138.25,20.5 137,20.5 137,21.25 136,21.25 136,22.75 136.5,22.75 136.5,25 138.25,25
NetL14_2 on BOT "NETL14_2_L06_P015" (solid, remove dead copper, pour order 15): 143.75,20.5 145,20.5 145,21.25 146,21.25 146,22.75 145.5,22.75 145.5,25 143.75,25
NetF10_2 on BOT "NETF10_2_L06_P028" (solid, remove dead copper, pour order 28): 88.5,63.5 88.5,68 91.25,68 91.25,63.5
3V3_AUX on INT SIG "3V3_AUX_L03_P063" (solid, remove dead copper, pour order 63): 73.5,54.5 71,54.5 71,51.25 73.5,51.25
NetQ3_5-6-7-8 on INT SIG "NETQ3_5-6-7-8_L03_P042" (solid, remove dead copper, pour order 42): 8,29 8,24.5 2,24.5 2,17 16,17 16,29
NetQ3_5-6-7-8 on GND1 "NETQ3_5-6-7-8_L02_P043" (solid, remove dead copper, pour order 43): 16,29 2,29 2,17 16,17
3V3_AUX on PWR + INT SIG "3V3_AUX_L04_P056" (solid, remove dead copper, pour order 56): 117,50 117,52 121,52 121,46 105,46 105,51 90,51 70,51 70,59.5 82,59.5 82,68 124,68 124,62 157.5,62 157.5,30.5 152.5,30.5 152.5,52 117,52 117,61 90,61 90,55 109,55 109,50
5V_MAIN on PWR + INT SIG "5V_MAIN_L04_P054" (solid, remove dead copper, pour order 54): 93,10.25 93,7.25 96.25,7.25 96.25,10.25
5V_MAIN on PWR + INT SIG "5V_MAIN_L04_P046" (solid, remove dead copper, pour order 46): 113.5,25.75 110.5,25.75 110.5,28 108,28 108,34.5 56,34.5 56,77 84,77 84,79.5 87,79.5 87,77 111.5,77 111.5,79.5 113.5,79.5 113.5,77 135.5,77 135.5,79.5 137.5,79.5 137.5,77 156,77 156,79.5 159,79.5 159,68 70,68 70,43 79.5,43 79.5,39.5 113.5,39.5
GND on GND2 "GND_L05_P052" (solid, remove dead copper, pour order 52): 83,-1 ccw(c84,-1) 84,-2 102,-2 ccw(c102,-1) 103,-1 cw(c104,-1) 104,0 107,0 cw(c107,-1) 108,-1 ccw(c109,-1) 109,-2 117,-2 ccw(c117,-1) 118,-1 cw(c119,-1) 119,0 159,0 ccw(c159,5) 164,5 164,83 ccw(c159,83) 159,88 5,88 ccw(c5,83) 0,83 0,5 ccw(c5,5) 5,0 82,0 cw(c82,-1)

## Silkscreen, mask and mechanical layers (free items; w line width, h text height)
Top Overlay:
  text "DBG_USB" at 7.61,86.392 h1
  text "FAN_0" at 37.667,86.392 h1
  text "FAN_1" at 50.834,86.392 h1
  text "DIG_1" at 63.11,86.392 h1
  text "HDMI_1" at 85.11,86.392 h1
  text "HDMI_0" at 108.777,86.392 h1
  text "DIG_0" at 134.776,86.392 h1
  text "RPI / FAN" at 116.052,70.905 h1
  text "nEEPROM_WP" at 144.754,68.865 h1.52
  text "USB_OTG_ID" at 144.754,66.365 h1.52
  text "nRPI_BOOT" at 144.754,63.865 h1.52
  text "nETH_SYNC" at 144.754,61.365 h1.52
  text "nWIFI_INH" at 144.754,58.865 h1.52
  text "nBT_INH" at 144.754,56.365 h1.52
  text "PMIC_EN" at 144.754,53.865 h1.52
  text "RPI" at 141.754,50.238 h1.52
  text "GMSL" at 141.754,47.238 h1.52
  text "SSD" at 141.754,44.238 h1.52
  text "WAKE" at 2.167,42.775 h1
  text "GPS" at 141.754,41.238 h1.52
  text "FRONT" at 73.725,22.775 h1
  text "FRONT" at 42.61,22.725 h1
  text "REAR" at 50.725,22.725 h1
  text "REAR" at 69.11,12 h1
Mechanical 1:
  the board outline again, w0.15

## Text inside footprints (layer, text, board x,y; h text height)
J9: Top 3D Body "RefDes2" at 137.365,64.223 h1.27 r270; Top 3D Body "B7" at 135.145,53.11 h1.27 r270; Top 3D Body "A7" at 139.585,53.11 h1.27 r270; Top 3D Body "B1" at 135.145,72.16 h1.27 r270; Top 3D Body "A1" at 139.585,72.16 h1.27 r270
J13_DISP_0: Top 3D Body "PCB EDGE" at 114.5,87.725 h0.8 r180
J13_DISP_1: Top 3D Body "PCB EDGE" at 90.5,87.725 h0.8 r180
U2: Bottom 3D Body "*" at 4.7,28.991 h1.27 r90; Bottom Overlay "*" at 3.822,30.115 h1.27 r90